# Altium PCB PCB1.PcbDoc (part 2 of 6)
Units mil, origin at the board's own origin, x right, y up, seen from the top; angles counter-clockwise.
Board outline 1280 x 1960 mil, 2 copper layers (Top Layer, Bottom Layer); 45 components, 63 nets, 326 pads, 83 vias.
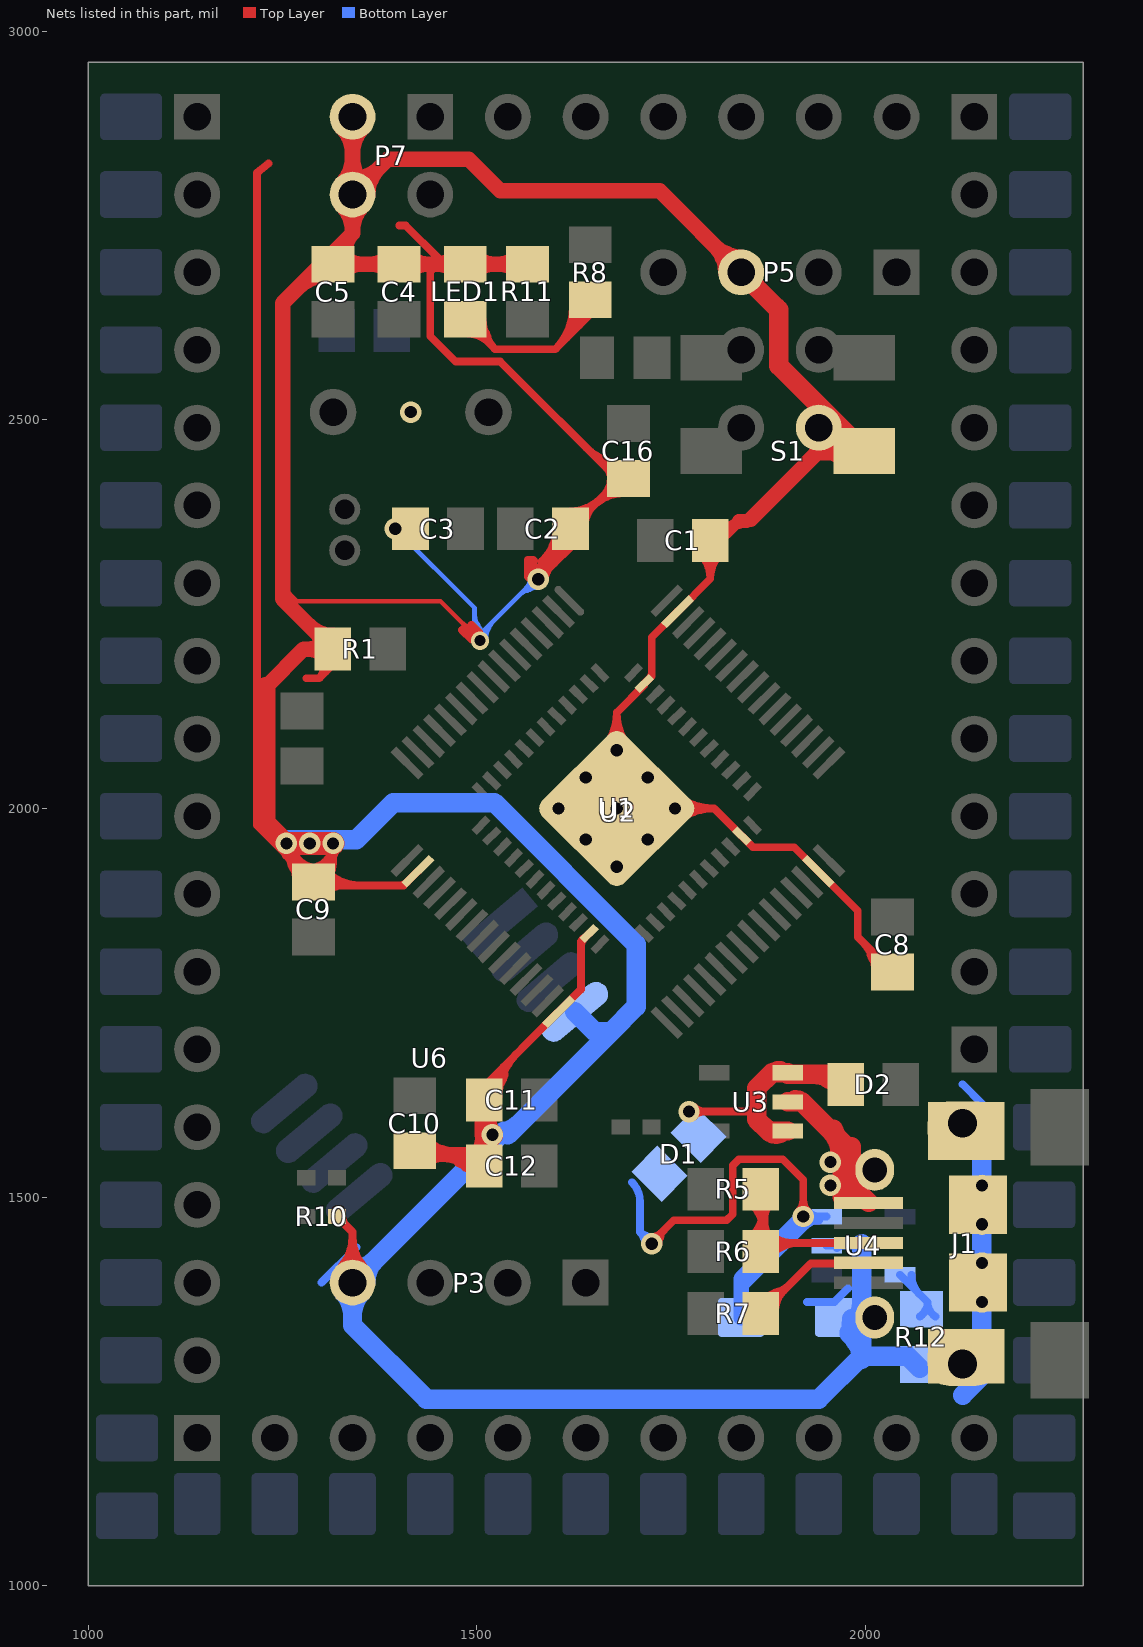
[diagram p2: the nets of this part, all layers, seen from the top]

## Via types
v1: diameter 27.56, hole 15.75, Top Layer to Bottom Layer, tented both sides, 79 vias
v2: diameter 23.62, hole 13.78, Top Layer to Bottom Layer, tented both sides, 3 vias
v3: diameter 23.62, hole 13.78, Top Layer to Bottom Layer, tented top, 1 vias

## Nets (pads, with @x,y where several pads share a name; then routed paths per layer and width w, separated by ;. In a path a pad name is that pad's centre, name@x,y a point inside that pad or via, vN(x,y) a via of type N, cw(c..) or ccw(c..) an arc to the next point about the centre after c; other vN are vias at no path point) (continued)
GND: C1.2 C2.1 C3.1 C4.1 C5.1 C8.2 C9.2 C10.1 C11.2 C12.2 C16.2 J1.4 LED1.2 P3.4 P5.3 P7.3 P7.4 pad.0@1940,2490 pad.1@1680,2000 pad.1@1965,1345 R1.2 R10.1 R11.2 R12.1 S1.1 U1.23 U1.35 U1.47 U2.18 U2.31 U2.47 U2.63 U3.2 U4.2 U6.4 | length 26636.5
  Top Layer w6: 1250,2285 1268.22,2266.78 1453.22,2266.78 v3@1497,2223 ; 1492.55,2223.12 ccw(c1504.93,2226.43) v3@1502.36,2213.88 ; 1496.88,2227.45 cw(c1493.57,2215.07) v3@1506.12,2217.64 ; 1481.96,2238.04 cw(c1466.92,2223) 1488.19,2223 ccw(c1466.92,2223) 1481.96,2238.04 ; 1481.96,2238.04 ccw(c1497,2253.08) 1497,2231.81 cw(c1497,2253.08) 1481.96,2238.04 ; 1487.96,2232.04 cw(c1472.92,2217) 1494.19,2217 ccw(c1472.92,2217) 1487.96,2232.04 ; 1487.96,2232.04 ccw(c1503,2247.08) 1503,2225.81 cw(c1503,2247.08) 1487.96,2232.04
  Top Layer w10: 1232,2830 1217,2818 1217,1978.43 ; 1239.74,1967.09 cw(c1234.08,1941.71) v1@1256.03,1955.65 ; v1@1252.13,1946.7 cw(c1249.35,1938.66) 1257.57,1940.86 cw(c1263.84,1942.54) v1@1260.08,1947.84 ; v1@1255.61,1956.06 cw(c1242.61,1933.53) 1267.73,1940.27 ; 1261.15,1928.9 ccw(c1295.15,1938.01) C9.2@1285.69,1904.11 ; 1261.39,1930.24 ccw(c1298.2,1940.1) C9.2@1285.61,1904.13 ; C9.2@1268.45,1911.49 ccw(c1235.24,1922.92) 1265.66,1940.48 ccw(c1295.61,1957.78) C9.2@1289.4,1923.75 ; 1280.94,2167.44 1297.21,2167.44 ; R1.2@1315.79,2186.02 1297.21,2167.44 ; R10.1@1320,1475 1340,1455 P3.4@1340,1390 ; 1400,2750 1408.47,2750 1450,2708.47 1450,2700.43 1440,2690.43 1440,2607.83 1472.83,2575 1530,2575 1680.43,2424.57 1680.43,2420 C2.1@1620.43,2360 C2.1@1620.43,2336.49 ; C10.1@1420,1559.57 1490.87,1559.57 C12.2@1510,1540.43 ; U2.18@1424.17,1919.25 1405.87,1900.96 1294.48,1900.96 C9.2@1290,1905.43 ; C10.1@1433.26,1543.45 cw(c1457.05,1502.28) 1469.33,1548.21 ; C10.1@1440.06,1568.89 ccw(c1476.74,1590.09) 1465.8,1549.16 ; 1466.69,1549.42 ccw(c1477.69,1566.95) C12.2@1494.47,1554.84 ; 1474.38,1554.64 ccw(c1483.71,1570.8) C12.2@1496.65,1557.35 ; 1475.72,1543.75 ccw(c1486.36,1560.69) C12.2@1502.57,1548.98 ; 1483.88,1549.15 cw(c1475.62,1534.84) C12.2@1491.58,1539.12 ; 1484.76,1538.08 ccw(c1495.02,1554.43) C12.2@1510.68,1543.13 ; 1485.89,1547.99 ccw(c1493.3,1560.83) C12.2@1503.59,1550.15 ; C11.2@1507.65,1637.34 ccw(c1502.52,1659.92) 1524.89,1653.93 ; C11.2@1509.57,1625 1509.57,1642.75 U2.31@1605.12,1738.3 1634,1767.18 1634,1828.72 U1.23@1644.51,1839.23 ; C11.2@1510.12,1627.68 ccw(c1491.54,1669.7) 1535.92,1657.81 ; C11.2@1524.04,1650.79 ccw(c1540,1646.51) C11.2@1525.69,1638.25 ; 1570.61,2306.01 cw(c1567.24,2293.43) v1@1580.15,2295.16 ; v1@1577.74,2295.24 cw(c1591.81,2292.36) 1588.09,2306.23 ; v1@1579.18,2293.8 ccw(c1576.3,2307.87) 1590.17,2304.15 ; 1595.97,2334.27 cw(c1627.13,2325.92) C2.1@1620.13,2357.41 ; 1599.61,2331.86 ccw(c1591.69,2361.44) C2.1@1621.79,2355.81 ; C2.1@1620.43,2345 C2.1@1620.43,2336.49 ; pad.1@1640.38,2038.84 ccw(c1635.07,2054.89) pad.1@1651.46,2050.75 ; pad.1@1648.35,2042.71 cw(c1657.63,2045.71) pad.1@1652.48,2053.99 ; pad.1@1648.55,2038.01 cw(c1686.77,2029.1) pad.1@1666.04,2062.43 ; pad.1@1661.24,2068.65 ccw(c1662.3,2077.71) pad.1@1671.32,2076.33 ; pad.1@1667.47,2062.33 ccw(c1661.15,2083.15) pad.1@1681.12,2074.52 ; pad.1@1678.88,2074.52 ccw(c1698.85,2083.15) pad.1@1692.53,2062.33 ; pad.1@1688.68,2076.33 ccw(c1697.7,2077.71) pad.1@1698.76,2068.65 ; pad.1@1693.96,2062.43 cw(c1673.23,2029.1) pad.1@1711.45,2038.01 ; pad.1@1707.52,2053.99 cw(c1702.37,2045.71) pad.1@1711.65,2042.71 ; pad.1@1708.54,2050.75 ccw(c1724.93,2054.89) pad.1@1719.62,2038.84 ; pad.1@1718.78,1959.98 cw(c1733.23,1960.2) pad.1@1726.51,1973 ; pad.1@1718.78,2040.02 ccw(c1733.23,2039.8) pad.1@1726.51,2027 ; pad.1@1718.86,1960.43 cw(c1735.46,1954.15) pad.1@1731.35,1971.42 ; pad.1@1718.86,2039.57 ccw(c1735.46,2045.85) pad.1@1731.35,2028.58 ; pad.1@1742.18,1987.37 cw(c1763.38,1980.77) pad.1@1754.51,2001.12 ; pad.1@1742.18,2012.63 ccw(c1763.38,2019.23) pad.1@1754.51,1998.88 ; 2006.15,1813.03 ccw(c2040.15,1822.14) C8.2@2030.69,1788.24 ; C8.2@2035,1789.57 1990,1834.57 1990,1868.43 U2.47@1939.18,1919.25 1908.43,1950 1855.28,1950 U1.35@1840.77,1964.51 1805.28,2000 v1(1755,2000) v1(1680,2000) v1(1680,2075) 1680,2123.34 ; 1217,1978.43 ccw(c1252.5,2013.93) 1254.63,1963.77 cw(c1252.5,2013.93) 1217,1978.43 ; 1217,1978.43 C9.2@1290,1905.43 ; v1@1253.93,1955.58 ccw(c1268.6,1947.66) 1254.16,1939.32 ; v1@1253.93,1955.58 ccw(c1268.6,1947.66) 1254.16,1939.32 ; v1@1253.93,1955.58 ccw(c1268.6,1947.66) 1254.16,1939.32 ; v1@1262.73,1950.83 ccw(c1287.1,1937.67) C9.2@1263.11,1923.82 ; v1@1262.73,1950.83 ccw(c1287.1,1937.67) C9.2@1263.11,1923.82 ; v1@1262.73,1950.83 ccw(c1287.1,1937.67) C9.2@1263.11,1923.82 ; C9.2@1290,1905.43 1290.43,1905.43 1315,1930 ; 1297.21,2167.44 ccw(c1284.48,2180.18) 1299.27,2190.44 cw(c1284.48,2180.18) 1297.21,2167.44 ; v1@1308.33,1949.29 cw(c1299.67,1941.87) 1310.69,1938.91 ; v1@1308.33,1949.29 cw(c1299.67,1941.87) 1310.69,1938.91 ; v1@1308.33,1949.29 cw(c1299.67,1941.87) 1310.69,1938.91 ; v1@1308.58,1949.01 cw(c1296.31,1937.57) 1312.51,1933.23 ; v1@1308.58,1949.01 cw(c1296.31,1937.57) 1312.51,1933.23 ; v1@1308.58,1949.01 cw(c1296.31,1937.57) 1312.51,1933.23 ; 1310.69,1938.91 cw(c1321.71,1935.96) v1@1317.92,1946.72 ; 1310.69,1938.91 cw(c1321.71,1935.96) v1@1317.92,1946.72 ; 1310.69,1938.91 cw(c1321.71,1935.96) v1@1317.92,1946.72 ; 1315,1930 cw(c1299.66,1945.33) 1296.58,1923.87 ccw(c1299.66,1945.33) 1315,1930 ; 1315,1930 ccw(c1326.73,1918.26) 1311.28,1912.22 cw(c1326.73,1918.26) 1315,1930 ; 1315,1930.02 cw(c1288.43,1930.02) 1294.24,1904.09 ccw(c1288.43,1930.02) 1315,1930.02 ; 1315,1930 v1(1315,1955) ; 1315,1933.8 cw(c1336.2,1933.8) 1321.21,1948.79 ccw(c1336.2,1933.8) 1315,1933.8 ; 1315,1933.8 ccw(c1293.8,1933.8) 1308.79,1948.79 cw(c1293.8,1933.8) 1315,1933.8 ; v1(1315,1955) cw(c1282.83,1955) 1289.86,1923.61 ccw(c1282.83,1955) v1(1315,1955) ; 1340,1425.07 cw(c1304.93,1425.07) 1329.73,1400.27 ccw(c1304.93,1425.07) 1340,1425.07 ; 1340,1425.07 ccw(c1375.07,1425.07) 1350.27,1400.27 cw(c1375.07,1425.07) 1340,1425.07 ; 1340,1449.21 cw(c1280.79,1449.21) 1322.66,1407.34 ccw(c1280.79,1449.21) 1340,1449.21 ; 1340,1449.21 ccw(c1399.21,1449.21) 1357.34,1407.34 cw(c1399.21,1449.21) 1340,1449.21 ; 1468.89,1559.57 cw(c1468.89,1604.53) 1437.1,1572.74 ccw(c1468.89,1604.53) 1468.89,1559.57 ; 1468.89,1559.57 ccw(c1468.89,1514.61) 1437.1,1546.4 cw(c1468.89,1514.61) 1468.89,1559.57 ; 1480.8,2229.54 ccw(c1496.45,2245.18) 1501.46,2223.63 cw(c1496.45,2245.18) 1480.8,2229.54 ; 1480.8,2229.54 1493.34,2217 1503,2217 1503,2226.66 1493.2,2236.47 ; 1493.2,2236.47 cw(c1482.09,2225.36) 1496.68,2219.53 ccw(c1482.09,2225.36) 1493.2,2236.47 ; 1565.57,2310 cw(c1553.93,2298.37) 1570.24,2296.17 ccw(c1553.93,2298.37) 1565.57,2310 ; 1565.57,2310 1565.57,2298.37 1573.94,2290 v1(1578.94,2295) ; 1565.57,2310 1565.57,2319.56 1572.63,2319.56 1573.94,2318.25 1566.87,2318.25 ; 1565.57,2310 1578.94,2296.63 v1(1578.94,2295) ; 1566.87,2318.25 cw(c1553.97,2305.35) 1570.83,2298.36 ccw(c1553.97,2305.35) 1566.87,2318.25 ; 1566.87,2318.25 1575,2310.12 ; 1575,2310.12 ccw(c1581.57,2310.12) 1580.44,2303.65 cw(c1581.57,2310.12) 1575,2310.12 ; 1575,2310.12 1575,2305 1580,2305 1583.94,2308.94 ; v1(1578.94,2295) 1598.94,2315 ; v1@1578.94,2303.78 ccw(c1578.94,2324.98) 1593.93,2309.99 ; v1@1578.94,2303.78 cw(c1578.94,2321.05) 1566.73,2308.84 ccw(c1578.94,2321.05) v1@1578.94,2303.78 ; v1@1578.94,2303.78 ccw(c1578.94,2324.98) 1593.93,2309.99 ; 1583.94,2308.94 cw(c1578.78,2308.94) 1578.84,2303.78 ccw(c1578.78,2308.94) 1583.94,2308.94 ; 1583.94,2308.94 1583.94,2318.25 ; 1583.94,2318.25 cw(c1566.21,2318.25) 1574.72,2302.7 ccw(c1566.21,2318.25) 1583.94,2318.25 ; 1583.94,2318.25 1587.81,2318.25 1591.06,2315 1598.94,2315 ; 1593.93,2309.99 ccw(c1608.91,2295) 1587.72,2295 cw(c1608.91,2295) 1593.93,2309.99 ; 1596.32,2331.06 cw(c1613.21,2314.17) 1617.27,2337.71 ccw(c1613.21,2314.17) 1596.32,2331.06 ; 1596.32,2331.06 ccw(c1580.54,2346.85) 1602.29,2351.87 cw(c1580.54,2346.85) 1596.32,2331.06 ; 1596.32,2331.06 1606.06,2331.06 ; 1596.32,2331.06 1586.59,2321.33 1592.61,2321.33 1598.94,2315 ; 1598.94,2315 ccw(c1579.32,2334.62) 1603.92,2347.45 cw(c1579.32,2334.62) 1598.94,2315 ; 1598.94,2315 C2.1@1620.43,2336.49 ; 1600,2325 ccw(c1585.99,2339.01) 1603.74,2347.8 cw(c1585.99,2339.01) 1600,2325 ; 1600,2325 1606.06,2331.06 ; 1606.06,2331.06 ccw(c1599.51,2337.62) 1606.46,2343.75 cw(c1599.51,2337.62) 1606.06,2331.06 ; 1606.79,2331.79 cw(c1620.43,2318.15) C2.1@1620.43,2337.44 ; 1606.79,2331.79 cw(c1620.43,2318.15) C2.1@1620.43,2337.44 ; 1606.79,2331.79 cw(c1620.43,2318.15) C2.1@1620.43,2337.44 ; 1606.79,2331.79 cw(c1620.43,2318.15) C2.1@1620.43,2337.44 ; C2.1@1620.43,2337.44 ccw(c1620.43,2294.63) 1590.16,2324.9 cw(c1620.43,2294.63) C2.1@1620.43,2337.44 ; pad.1@1639.87,2048.78 ccw(c1639.63,2065.22) pad.1@1651.42,2053.76 ; pad.1@1639.87,2048.78 ccw(c1639.63,2065.22) pad.1@1651.42,2053.76 ; pad.1@1639.87,2048.78 ccw(c1639.63,2065.22) pad.1@1651.42,2053.76 ; pad.1@1641.17,2048.7 ccw(c1642.43,2058.06) pad.1@1649.21,2051.48 ; pad.1@1641.17,2048.7 ccw(c1642.43,2058.06) pad.1@1649.21,2051.48 ; pad.1@1641.17,2048.7 ccw(c1642.43,2058.06) pad.1@1649.21,2051.48 ; pad.1@1644.28,2060.27 cw(c1665.56,2038.63) pad.1@1676.76,2066.84 ; pad.1@1644.28,2060.27 cw(c1665.56,2038.63) pad.1@1676.76,2066.84 ; pad.1@1644.28,2060.27 cw(c1665.56,2038.63) pad.1@1676.76,2066.84 ; pad.1@1647.93,2043.76 cw(c1654.13,2046.7) pad.1@1649.21,2051.48 ; pad.1@1647.93,2043.76 cw(c1654.13,2046.7) pad.1@1649.21,2051.48 ; pad.1@1647.93,2043.76 cw(c1654.13,2046.7) pad.1@1649.21,2051.48 ; pad.1@1648.78,2040.13 cw(c1674.73,2040.51) pad.1@1656.11,2058.59 ; pad.1@1648.78,2040.13 cw(c1674.73,2040.51) pad.1@1656.11,2058.59 ; pad.1@1648.78,2040.13 cw(c1674.73,2040.51) pad.1@1656.11,2058.59 ; pad.1@1650.27,2052.61 cw(c1681.71,2023.18) pad.1@1680.29,2066.23 ; pad.1@1650.27,2052.61 cw(c1681.71,2023.18) pad.1@1680.29,2066.23 ; pad.1@1650.27,2052.61 cw(c1681.71,2023.18) pad.1@1680.29,2066.23 ; pad.1@1655.22,2071.03 cw(c1671.75,2054.22) pad.1@1680.45,2076.13 ; pad.1@1655.22,2071.03 cw(c1671.75,2054.22) pad.1@1680.45,2076.13 ; pad.1@1655.22,2071.03 cw(c1671.75,2054.22) pad.1@1680.45,2076.13 ; pad.1@1666.17,2081.79 cw(c1677.94,2069.82) pad.1@1684.14,2085.43 ; pad.1@1666.17,2081.79 cw(c1677.94,2069.82) pad.1@1684.14,2085.43 ; pad.1@1666.17,2081.79 cw(c1677.94,2069.82) pad.1@1684.14,2085.43 ; pad.1@1666.77,2070.24 cw(c1680.58,2057.3) pad.1@1679.96,2076.22 ; pad.1@1666.77,2070.24 cw(c1680.58,2057.3) pad.1@1679.96,2076.22 ; pad.1@1666.77,2070.24 cw(c1680.58,2057.3) pad.1@1679.96,2076.22 ; C16.2@1672.44,2424.57 ccw(c1653.15,2424.57) 1666.79,2438.21 cw(c1653.15,2424.57) C16.2@1672.44,2424.57 ; C16.2@1672.44,2424.57 cw(c1642.12,2424.57) 1663.56,2403.13 ccw(c1642.12,2424.57) C16.2@1672.44,2424.57 ; pad.1@1675.86,2085.43 cw(c1682.06,2069.82) pad.1@1693.83,2081.79 ; pad.1@1675.86,2085.43 cw(c1682.06,2069.82) pad.1@1693.83,2081.79 ; pad.1@1675.86,2085.43 cw(c1682.06,2069.82) pad.1@1693.83,2081.79 ; pad.1@1679.55,2076.13 cw(c1688.25,2054.22) pad.1@1704.78,2071.03 ; pad.1@1679.55,2076.13 cw(c1688.25,2054.22) pad.1@1704.78,2071.03 ; pad.1@1679.55,2076.13 cw(c1688.25,2054.22) pad.1@1704.78,2071.03 ; pad.1@1679.71,2066.23 cw(c1678.29,2023.18) pad.1@1709.73,2052.61 ; pad.1@1679.71,2066.23 cw(c1678.29,2023.18) pad.1@1709.73,2052.61 ; pad.1@1679.71,2066.23 cw(c1678.29,2023.18) pad.1@1709.73,2052.61 ; pad.1@1680,2021.2 cw(c1658.8,2021.2) 1673.79,2006.21 ccw(c1658.8,2021.2) pad.1@1680,2021.2 ; pad.1@1680,2021.2 ccw(c1701.2,2021.2) pad.1@1686.21,2006.21 ; pad.1@1680,2021.2 ccw(c1701.2,2021.2) pad.1@1686.21,2006.21 ; pad.1@1680,2053.8 cw(c1701.2,2053.8) 1686.21,2068.79 ccw(c1701.2,2053.8) pad.1@1680,2053.8 ; pad.1@1680,2053.8 ccw(c1658.8,2053.8) 1673.79,2068.79 cw(c1658.8,2053.8) pad.1@1680,2053.8 ; pad.1@1680,2088.1 cw(c1627.39,2088.1) 1654.36,2042.93 ccw(c1627.39,2088.1) pad.1@1680,2088.1 ; pad.1@1680,2088.1 ccw(c1732.61,2088.1) 1705.64,2042.93 cw(c1732.61,2088.1) pad.1@1680,2088.1 ; pad.1@1680,2096.2 cw(c1658.8,2096.2) 1673.79,2081.21 ccw(c1658.8,2096.2) pad.1@1680,2096.2 ; pad.1@1680,2096.2 ccw(c1701.2,2096.2) 1686.21,2081.21 cw(c1701.2,2096.2) pad.1@1680,2096.2 ; 1680,2105.72 cw(c1616.86,2105.72) 1649.24,2051.51 ccw(c1616.86,2105.72) 1680,2105.72 ; 1680,2105.72 ccw(c1743.14,2105.72) 1710.76,2051.51 cw(c1743.14,2105.72) 1680,2105.72 ; 1680,2123.34 cw(c1606.34,2123.34) 1644.11,2060.1 ccw(c1606.34,2123.34) 1680,2123.34 ; 1680,2123.34 ccw(c1753.66,2123.34) 1715.89,2060.1 cw(c1753.66,2123.34) 1680,2123.34 ; 1680,2123.34 1715.49,2158.84 U1.47@1715.49,2160.77 1725.1,2170.38 1725.1,2220.19 U2.63@1758.23,2253.32 1758.32,2253.32 1800.43,2295.43 1800.43,2335 1804.96,2335 1837.24,2367.28 ; pad.1@1680.04,2076.22 cw(c1679.42,2057.3) pad.1@1693.23,2070.24 ; pad.1@1680.04,2076.22 cw(c1679.42,2057.3) pad.1@1693.23,2070.24 ; pad.1@1680.04,2076.22 cw(c1679.42,2057.3) pad.1@1693.23,2070.24 ; pad.1@1683.24,2066.84 cw(c1694.44,2038.63) pad.1@1715.72,2060.27 ; pad.1@1683.24,2066.84 cw(c1694.44,2038.63) pad.1@1715.72,2060.27 ; pad.1@1683.24,2066.84 cw(c1694.44,2038.63) pad.1@1715.72,2060.27 ; pad.1@1686.21,2006.21 ccw(c1701.2,2021.2) pad.1@1701.2,2000 ; pad.1@1686.21,2006.21 ccw(c1701.2,2021.2) pad.1@1701.2,2000 ; pad.1@1701.2,2000 ccw(c1701.2,1978.8) 1686.21,1993.79 cw(c1701.2,1978.8) pad.1@1701.2,2000 ; pad.1@1703.89,2058.59 cw(c1685.27,2040.51) pad.1@1711.22,2040.13 ; pad.1@1703.89,2058.59 cw(c1685.27,2040.51) pad.1@1711.22,2040.13 ; pad.1@1703.89,2058.59 cw(c1685.27,2040.51) pad.1@1711.22,2040.13 ; pad.1@1708.58,2053.76 ccw(c1720.37,2065.22) pad.1@1720.13,2048.78 ; pad.1@1708.58,2053.76 ccw(c1720.37,2065.22) pad.1@1720.13,2048.78 ; pad.1@1708.58,2053.76 ccw(c1720.37,2065.22) pad.1@1720.13,2048.78 ; pad.1@1710.79,2051.48 cw(c1705.87,2046.7) pad.1@1712.07,2043.76 ; pad.1@1710.79,2051.48 ccw(c1717.57,2058.06) pad.1@1718.83,2048.7 ; pad.1@1710.79,2051.48 cw(c1705.87,2046.7) pad.1@1712.07,2043.76 ; pad.1@1710.79,2051.48 ccw(c1717.57,2058.06) pad.1@1718.83,2048.7 ; pad.1@1710.79,2051.48 cw(c1705.87,2046.7) pad.1@1712.07,2043.76 ; pad.1@1710.79,2051.48 ccw(c1717.57,2058.06) pad.1@1718.83,2048.7 ; pad.1@1718.07,1968.56 ccw(c1709.6,2006.16) pad.1@1742.17,1985.57 ; pad.1@1718.07,1968.56 ccw(c1709.6,2006.16) pad.1@1742.17,1985.57 ; pad.1@1718.07,1968.56 ccw(c1709.6,2006.16) pad.1@1742.17,1985.57 ; pad.1@1718.07,1968.56 ccw(c1709.6,2006.16) pad.1@1742.17,1985.57 ; pad.1@1718.07,2031.44 cw(c1709.6,1993.84) pad.1@1742.17,2014.43 ; pad.1@1718.07,2031.44 cw(c1709.6,1993.84) pad.1@1742.17,2014.43 ; pad.1@1718.07,2031.44 cw(c1709.6,1993.84) pad.1@1742.17,2014.43 ; pad.1@1718.07,2031.44 cw(c1709.6,1993.84) pad.1@1742.17,2014.43 ; pad.1@1720.25,1968.78 ccw(c1720.98,1994.77) pad.1@1738.84,1975.87 ; pad.1@1720.25,1968.78 ccw(c1720.98,1994.77) pad.1@1738.84,1975.87 ; pad.1@1720.25,1968.78 ccw(c1720.98,1994.77) pad.1@1738.84,1975.87 ; pad.1@1720.25,2031.22 cw(c1720.98,2005.23) pad.1@1738.84,2024.13 ; pad.1@1720.25,2031.22 cw(c1720.98,2005.23) pad.1@1738.84,2024.13 ; pad.1@1720.25,2031.22 cw(c1720.98,2005.23) pad.1@1738.84,2024.13 ; pad.1@1723.3,1968.13 ccw(c1726.34,1975.6) pad.1@1733.15,1971.29 ; pad.1@1723.3,1968.13 ccw(c1726.34,1975.6) pad.1@1733.15,1971.29 ; pad.1@1723.3,1968.13 ccw(c1726.34,1975.6) pad.1@1733.15,1971.29 ; pad.1@1723.3,1968.13 ccw(c1726.34,1975.6) pad.1@1733.15,1971.29 ; pad.1@1723.3,2031.87 cw(c1726.34,2024.4) pad.1@1733.15,2028.71 ; pad.1@1723.3,2031.87 cw(c1726.34,2024.4) pad.1@1733.15,2028.71 ; pad.1@1723.3,2031.87 cw(c1726.34,2024.4) pad.1@1733.15,2028.71 ; pad.1@1723.3,2031.87 cw(c1726.34,2024.4) pad.1@1733.15,2028.71 ; pad.1@1724.29,1967.66 ccw(c1727.09,1972.67) pad.1@1731.04,1968.5 ; pad.1@1724.29,1967.66 ccw(c1727.09,1972.67) pad.1@1731.04,1968.5 ; pad.1@1724.29,1967.66 ccw(c1727.09,1972.67) pad.1@1731.04,1968.5 ; pad.1@1724.29,2032.34 cw(c1727.09,2027.33) pad.1@1731.04,2031.5 ; pad.1@1724.29,2032.34 cw(c1727.09,2027.33) pad.1@1731.04,2031.5 ; pad.1@1724.29,2032.34 cw(c1727.09,2027.33) pad.1@1731.04,2031.5 ; pad.1@1728.66,1961.43 cw(c1736.5,1962.73) pad.1@1731.04,1968.5 ; pad.1@1728.66,1961.43 cw(c1736.5,1962.73) pad.1@1731.04,1968.5 ; pad.1@1728.66,1961.43 cw(c1736.5,1962.73) pad.1@1731.04,1968.5 ; pad.1@1728.66,2038.57 ccw(c1736.5,2037.27) pad.1@1731.04,2031.5 ; pad.1@1728.66,2038.57 ccw(c1736.5,2037.27) pad.1@1731.04,2031.5 ; pad.1@1728.66,2038.57 ccw(c1736.5,2037.27) pad.1@1731.04,2031.5 ; pad.1@1728.78,1959.75 cw(c1745.15,1959.29) pad.1@1733.9,1971.2 ; pad.1@1728.78,1959.75 cw(c1745.15,1959.29) pad.1@1733.9,1971.2 ; pad.1@1728.78,1959.75 cw(c1745.15,1959.29) pad.1@1733.9,1971.2 ; pad.1@1728.78,2040.25 ccw(c1745.15,2040.71) pad.1@1733.9,2028.8 ; pad.1@1728.78,2040.25 ccw(c1745.15,2040.71) pad.1@1733.9,2028.8 ; pad.1@1728.78,2040.25 ccw(c1745.15,2040.71) pad.1@1733.9,2028.8 ; pad.1@1731.86,1969.26 ccw(c1701.51,2002.15) pad.1@1746.23,2000.35 ; pad.1@1731.86,1969.26 ccw(c1701.51,2002.15) pad.1@1746.23,2000.35 ; pad.1@1731.86,1969.26 ccw(c1701.51,2002.15) pad.1@1746.23,2000.35 ; pad.1@1731.86,2030.74 cw(c1701.51,1997.85) pad.1@1746.23,1999.65 ; pad.1@1731.86,2030.74 cw(c1701.51,1997.85) pad.1@1746.23,1999.65 ; pad.1@1731.86,2030.74 cw(c1701.51,1997.85) pad.1@1746.23,1999.65 ; pad.1@1733.8,2000 cw(c1733.8,1978.8) 1748.79,1993.79 ccw(c1733.8,1978.8) pad.1@1733.8,2000 ; pad.1@1733.8,2000 ccw(c1733.8,2021.2) 1748.79,2006.21 cw(c1733.8,2021.2) pad.1@1733.8,2000 ; pad.1@1736.31,1984.18 ccw(c1720.75,2004.75) pad.1@1746.3,2001.21 ; pad.1@1736.31,1984.18 ccw(c1720.75,2004.75) pad.1@1746.3,2001.21 ; pad.1@1736.31,1984.18 ccw(c1720.75,2004.75) pad.1@1746.3,2001.21 ; pad.1@1736.31,2015.82 cw(c1720.75,1995.25) pad.1@1746.3,1998.79 ; pad.1@1736.31,2015.82 cw(c1720.75,1995.25) pad.1@1746.3,1998.79 ; pad.1@1736.31,2015.82 cw(c1720.75,1995.25) pad.1@1746.3,1998.79 ; pad.1@1740.18,1964.34 ccw(c1719.45,1985.49) pad.1@1746.87,1996.68 ; pad.1@1740.18,1964.34 ccw(c1719.45,1985.49) pad.1@1746.87,1996.68 ; pad.1@1740.18,1964.34 ccw(c1719.45,1985.49) pad.1@1746.87,1996.68 ; pad.1@1740.18,2035.66 cw(c1719.45,2014.51) pad.1@1746.87,2003.32 ; pad.1@1740.18,2035.66 cw(c1719.45,2014.51) pad.1@1746.87,2003.32 ; pad.1@1740.18,2035.66 cw(c1719.45,2014.51) pad.1@1746.87,2003.32 ; pad.1@1741.5,1988.1 cw(c1751.51,1974.87) pad.1@1753.79,1991.3 ; pad.1@1741.5,1988.1 cw(c1751.51,1974.87) pad.1@1753.79,1991.3 ; pad.1@1741.5,1988.1 cw(c1751.51,1974.87) pad.1@1753.79,1991.3 ; pad.1@1741.5,2011.9 ccw(c1751.51,2025.13) pad.1@1753.79,2008.7 ; pad.1@1741.5,2011.9 ccw(c1751.51,2025.13) pad.1@1753.79,2008.7 ; pad.1@1741.5,2011.9 ccw(c1751.51,2025.13) pad.1@1753.79,2008.7 ; pad.1@1749.6,1985.63 ccw(c1735.62,2000.78) pad.1@1756.22,1999.95 ; pad.1@1749.6,1985.63 ccw(c1735.62,2000.78) pad.1@1756.22,1999.95 ; pad.1@1749.6,1985.63 ccw(c1735.62,2000.78) pad.1@1756.22,1999.95 ; pad.1@1749.6,2014.37 cw(c1735.62,1999.22) pad.1@1756.22,2000.05 ; pad.1@1749.6,2014.37 cw(c1735.62,1999.22) pad.1@1756.22,2000.05 ; pad.1@1749.6,2014.37 cw(c1735.62,1999.22) pad.1@1756.22,2000.05 ; pad.1@1750.81,1974.75 ccw(c1734.34,1991.57) pad.1@1756.13,2000.46 ; pad.1@1750.81,1974.75 ccw(c1734.34,1991.57) pad.1@1756.13,2000.46 ; pad.1@1750.81,1974.75 ccw(c1734.34,1991.57) pad.1@1756.13,2000.46 ; pad.1@1750.81,2025.25 cw(c1734.34,2008.43) pad.1@1756.13,1999.54 ; pad.1@1750.81,2025.25 cw(c1734.34,2008.43) pad.1@1756.13,1999.54 ; pad.1@1750.81,2025.25 cw(c1734.34,2008.43) pad.1@1756.13,1999.54 ; pad.1@1761.44,1985.17 ccw(c1749.22,1997.64) pad.1@1765.39,2004.24 ; pad.1@1761.44,1985.17 ccw(c1749.22,1997.64) pad.1@1765.39,2004.24 ; pad.1@1761.44,1985.17 ccw(c1749.22,1997.64) pad.1@1765.39,2004.24 ; pad.1@1761.44,2014.83 cw(c1749.22,2002.36) pad.1@1765.39,1995.76 ; pad.1@1761.44,2014.83 cw(c1749.22,2002.36) pad.1@1765.39,1995.76 ; pad.1@1761.44,2014.83 cw(c1749.22,2002.36) pad.1@1765.39,1995.76 ; pad.1@1763.5,1997.79 cw(c1771.11,1995.81) pad.1@1772.95,2003.46 ; pad.1@1763.5,1997.79 cw(c1771.11,1995.81) pad.1@1772.95,2003.46 ; pad.1@1763.5,1997.79 cw(c1771.11,1995.81) pad.1@1772.95,2003.46 ; pad.1@1763.5,2002.21 ccw(c1771.11,2004.19) pad.1@1772.95,1996.54 ; pad.1@1763.5,2002.21 ccw(c1771.11,2004.19) pad.1@1772.95,1996.54 ; pad.1@1763.5,2002.21 ccw(c1771.11,2004.19) pad.1@1772.95,1996.54 ; pad.1@1769.48,2000 cw(c1769.48,2055.07) 1722.58,2026.21 ccw(c1769.48,2055.07) pad.1@1769.48,2000 ; pad.1@1769.48,2000 ccw(c1769.48,1944.93) 1722.58,1973.79 cw(c1769.48,1944.93) pad.1@1769.48,2000 ; pad.1@1776.2,2000 cw(c1776.2,2021.2) 1761.21,2006.21 ccw(c1776.2,2021.2) pad.1@1776.2,2000 ; pad.1@1776.2,2000 ccw(c1776.2,1978.8) 1761.21,1993.79 cw(c1776.2,1978.8) pad.1@1776.2,2000 ; 1787.38,2000 cw(c1787.38,2066.08) 1731.1,2031.45 ccw(c1787.38,2066.08) 1787.38,2000 ; 1787.38,2000 ccw(c1787.38,1933.92) 1731.1,1968.55 cw(c1787.38,1933.92) 1787.38,2000 ; 1800.43,2296.11 cw(c1845.39,2296.11) 1813.6,2327.9 ccw(c1845.39,2296.11) 1800.43,2296.11 ; 1800.43,2296.11 ccw(c1755.48,2296.11) 1787.27,2327.9 cw(c1755.48,2296.11) 1800.43,2296.11 ; 1805.27,2000 cw(c1805.27,2077.09) 1739.62,2036.69 ccw(c1805.27,2077.09) 1805.27,2000 ; 1805.27,2000 ccw(c1805.27,1922.91) 1739.62,1963.31 cw(c1805.27,1922.91) 1805.27,2000 ; 1837.23,2367.28 cw(c1822.23,2382.28) 1810.62,2364.52 ccw(c1822.23,2382.28) 1837.23,2367.28 ; 1233.1,1962.33 ccw(c1253.81,1983.05) 1255.05,1953.78 cw(c1253.81,1983.05) 1233.1,1962.33 ; v1@1251.49,1943.94 cw(c1212.98,1905.43) 1267.44,1905.43 ccw(c1212.98,1905.43) v1@1251.49,1943.94 ; v1@1253.78,1955 ccw(c1286,1955) 1263.22,1932.22 cw(c1286,1955) v1@1253.78,1955 ; 1260.99,1934.44 ccw(c1286.06,1959.51) 1286.06,1924.06 cw(c1286.06,1959.51) 1260.99,1934.44 ; v1@1263.78,1955 ccw(c1320.14,1955) 1280.29,1915.15 cw(c1320.14,1955) v1@1263.78,1955 ; C9.2@1268.56,1926.87 cw(c1247.12,1905.43) 1277.44,1905.43 ccw(c1247.12,1905.43) C9.2@1268.56,1926.87 ; C9.2@1292.05,1913.85 ccw(c1285.63,1942.51) 1315,1942.51 cw(c1285.63,1942.51) C9.2@1292.05,1913.85 ; C9.2@1300.03,1911.53 ccw(c1325.56,1937.06) 1325.56,1900.96 cw(c1325.56,1937.06) C9.2@1300.03,1911.53 ; 1305.67,2175.9 ccw(c1294.46,2187.11) 1307.48,2196.15 cw(c1294.46,2187.11) 1305.67,2175.9 ; C9.2@1307.1,1892.27 cw(c1328.09,1871.29) 1328.09,1900.96 ccw(c1328.09,1871.29) C9.2@1307.1,1892.27 ; C9.2@1307.1,1918.6 ccw(c1349.7,1961.2) 1349.7,1900.96 cw(c1349.7,1961.2) C9.2@1307.1,1918.6 ; R10.1@1326.81,1475 ccw(c1343.25,1475) 1331.63,1463.37 cw(c1343.25,1475) R10.1@1326.81,1475 ; 1400,1900.96 ccw(c1400,1915.13) 1410.02,1905.11 cw(c1400,1915.13) 1400,1900.96 ; C10.1@1426.87,1559.57 cw(c1426.87,1461.24) 1496.4,1530.77 ccw(c1426.87,1461.24) C10.1@1426.87,1559.57 ; 1451.01,1559.57 cw(c1451.01,1485.39) 1503.47,1537.84 ccw(c1451.01,1485.39) 1451.01,1559.57 ; 1475.16,1559.57 cw(c1475.16,1509.53) 1510.54,1544.91 ccw(c1475.16,1509.53) 1475.16,1559.57 ; C11.2@1518.19,1628.94 cw(c1572.34,1628.94) 1534.05,1667.23 ccw(c1572.34,1628.94) C11.2@1518.19,1628.94 ; C11.2@1528.19,1628.94 cw(c1606.49,1628.94) 1551.12,1684.3 ccw(c1606.49,1628.94) C11.2@1528.19,1628.94 ; 1588.01,2322.75 ccw(c1554.7,2356.06) 1601.81,2356.06 cw(c1554.7,2356.06) 1588.01,2322.75 ; 1608.58,2324.64 ccw(c1591.99,2341.23) 1612.79,2352.08 cw(c1591.99,2341.23) 1608.58,2324.64 ; C2.1@1620.43,2372.56 ccw(c1620.43,2402.88) 1641.87,2381.44 cw(c1620.43,2402.88) C2.1@1620.43,2372.56 ; C2.1@1620.43,2382.56 ccw(c1620.43,2437.02) 1658.94,2398.51 cw(c1620.43,2437.02) C2.1@1620.43,2382.56 ; 1634,1821.93 cw(c1650.67,1821.93) 1638.88,1833.72 ccw(c1650.67,1821.93) 1634,1821.93 ; 1634,1826.68 cw(c1641.53,1826.68) 1638.91,1833.74 ccw(c1641.53,1826.68) 1634,1826.68 ; C2.1@1639.05,2363.94 cw(c1674.51,2363.94) 1649.44,2389.01 ccw(c1674.51,2363.94) C2.1@1639.05,2363.94 ; 1641.13,2463.87 ccw(c1691.06,2513.81) 1691.06,2443.19 cw(c1691.06,2513.81) 1641.13,2463.87 ; 1648.92,2388.49 cw(c1691.06,2346.35) 1691.06,2405.94 ccw(c1691.06,2346.35) 1648.92,2388.49 ; 1658.2,2446.8 ccw(c1691.06,2479.67) 1691.06,2433.19 cw(c1691.06,2479.67) 1658.2,2446.8 ; 1665.99,2405.56 cw(c1691.06,2380.49) 1691.06,2415.94 ccw(c1691.06,2380.49) 1665.99,2405.56 ; U1.47@1721.12,2166.28 ccw(c1711.49,2175.91) 1725.1,2175.91 cw(c1711.49,2175.91) U1.47@1721.12,2166.28 ; C1.2@1805.15,2356.15 ccw(c1815.35,2371.75) 1828.53,2358.57 cw(c1815.35,2371.75) C1.2@1805.15,2356.15 ; 1996.49,1828.08 cw(c1957.98,1789.57) 2012.44,1789.57 ccw(c1957.98,1789.57) 1996.49,1828.08 ; 2005.99,1818.57 ccw(c2031.06,1843.64) 2031.06,1808.19 cw(c2031.06,1843.64) 2005.99,1818.57 ; C8.2@2013.56,1811.01 cw(c1992.12,1789.57) 2022.44,1789.57 ccw(c1992.12,1789.57) C8.2@2013.56,1811.01
  Top Layer w15: C1.2@1800.43,2345 1811.42,2345 1833.7,2367.28 ; 1837.24,2367.28 1833.7,2367.28 ; 1833.7,2367.28 cw(c1818.02,2382.96) 1807.84,2363.26 ccw(c1818.02,2382.96) 1833.7,2367.28 ; 1935.4,2460 cw(c1935.4,2406.82) 1973.01,2444.42 ccw(c1935.4,2406.82) 1935.4,2460 ; 1935.4,2460 ccw(c1935.4,2513.18) 1973.01,2475.58 cw(c1935.4,2513.18) 1935.4,2460
  Top Layer w18: 1837.24,2370 1847.28,2370
  Top Layer w20: 1228.5,2156.5 1277,2205 R1.2@1314.57,2205 1250,2269.57 1250,2285 1250,2650 1340,2740 ; C5.1@1315,2700.43 C4.1@1400,2700.43 1450,2700.43 ; P7.4@1339.54,2790.09 cw(c1372.6,2783.32) 1363.86,2815.92 ; P7.3@1340,2890 P7.4@1340,2790 ; P7.4@1340.09,2789.54 ccw(c1333.32,2822.6) 1365.92,2813.86 ; R11.2@1550,2700.43 LED1.2@1485,2700.43 1450,2700.43 ; 1814.08,2713.86 ccw(c1846.68,2722.6) P5.3@1839.91,2689.54 ; 1816.14,2715.92 cw(c1807.4,2683.32) P5.3@1840.46,2690.09 ; 1852.58,2372.28 1923.5,2443.2 ; P5.3@1860,2670 P5.3@1840,2690 1735,2795 1530,2795 1489.47,2835.53 1385.53,2835.53 P7.4@1340,2790 ; 1923.5,2443.5 1940,2460 ; 1281.68,2205 cw(c1281.68,2172.11) 1304.93,2195.37 ccw(c1281.68,2172.11) 1281.68,2205 ; 1281.68,2205 ccw(c1281.68,2237.89) 1304.93,2214.63 cw(c1281.68,2237.89) 1281.68,2205 ; 1340,2740 ccw(c1364.14,2715.86) 1331.83,2704.83 cw(c1364.14,2715.86) 1340,2740 ; 1340,2740 P7.4@1340,2790 ; 1340,2742.86 cw(c1387.14,2742.86) 1353.81,2776.19 ccw(c1387.14,2742.86) 1340,2742.86 ; 1340,2742.86 ccw(c1292.86,2742.86) 1326.19,2776.19 cw(c1292.86,2742.86) 1340,2742.86 ; 1340,2837.14 cw(c1292.86,2837.14) 1326.19,2803.81 ccw(c1292.86,2837.14) 1340,2837.14 ; 1340,2837.14 ccw(c1387.14,2837.14) 1353.81,2803.81 cw(c1387.14,2837.14) 1340,2837.14 ; 1340,2842.86 cw(c1387.14,2842.86) 1353.81,2876.19 ccw(c1387.14,2842.86) 1340,2842.86 ; 1340,2842.86 ccw(c1292.86,2842.86) 1326.19,2876.19 cw(c1292.86,2842.86) 1340,2842.86 ; 1351.82,2700.43 cw(c1351.82,2733.32) 1328.57,2710.07 ccw(c1351.82,2733.32) 1351.82,2700.43 ; 1351.82,2700.43 ccw(c1351.82,2667.55) 1328.57,2690.8 cw(c1351.82,2667.55) 1351.82,2700.43 ; 1363.18,2700.43 cw(c1363.18,2667.55) 1386.43,2690.8 ccw(c1363.18,2667.55) 1363.18,2700.43 ; 1363.18,2700.43 ccw(c1363.18,2733.32) 1386.43,2710.07 cw(c1363.18,2733.32) 1363.18,2700.43 ; 1373.34,2823.34 cw(c1340,2856.67) 1340,2809.53 ccw(c1340,2856.67) 1373.34,2823.34 ; 1373.34,2823.34 ccw(c1406.67,2790) 1359.53,2790 cw(c1406.67,2790) 1373.34,2823.34 ; 1436.82,2700.43 cw(c1436.82,2733.32) 1413.57,2710.07 ccw(c1436.82,2733.32) 1436.82,2700.43 ; 1436.82,2700.43 ccw(c1436.82,2667.55) 1413.57,2690.8 cw(c1436.82,2667.55) 1436.82,2700.43 ; 1448.18,2700.43 cw(c1448.18,2667.55) 1471.43,2690.8 ccw(c1448.18,2667.55) 1448.18,2700.43 ; 1448.18,2700.43 ccw(c1448.18,2733.32) 1471.43,2710.07 cw(c1448.18,2733.32) 1448.18,2700.43 ; 1450,2700.43 cw(c1450,2671.83) LED1.2@1471.04,2691.21 ; 1450,2700.43 ccw(c1450,2729.04) LED1.2@1471.04,2709.66 ; 1450,2700.43 cw(c1450,2671.83) LED1.2@1471.04,2691.21 ; 1450,2700.43 ccw(c1450,2729.04) LED1.2@1471.04,2709.66 ; 1450,2700.43 cw(c1450,2671.83) LED1.2@1471.04,2691.21 ; 1450,2700.43 ccw(c1450,2729.04) LED1.2@1471.04,2709.66 ; 1450,2700.43 cw(c1450,2671.83) LED1.2@1471.04,2691.21 ; 1450,2700.43 ccw(c1450,2729.04) LED1.2@1471.04,2709.66 ; 1521.82,2700.43 cw(c1521.82,2733.32) 1498.57,2710.07 ccw(c1521.82,2733.32) 1521.82,2700.43 ; 1521.82,2700.43 ccw(c1521.82,2667.55) 1498.57,2690.8 cw(c1521.82,2667.55) 1521.82,2700.43 ; 1528.18,2700.43 cw(c1528.18,2667.55) 1551.43,2690.8 ccw(c1528.18,2667.55) 1528.18,2700.43 ; 1528.18,2700.43 ccw(c1528.18,2733.32) 1551.43,2710.07 cw(c1528.18,2733.32) 1528.18,2700.43 ; 1806.66,2723.34 cw(c1773.33,2690) 1820.47,2690 ccw(c1773.33,2690) 1806.66,2723.34 ; 1806.66,2723.34 ccw(c1840,2756.67) 1840,2709.53 cw(c1840,2756.67) 1806.66,2723.34 ; 1269.66,2669.66 cw(c1311.06,2628.26) 1311.06,2686.81 ccw(c1311.06,2628.26) 1269.66,2669.66 ; 1284.59,2234.98 ccw(c1314.57,2264.95) 1314.57,2222.56 cw(c1314.57,2264.95) 1284.59,2234.98 ; R1.2@1294.1,2225.47 cw(c1277.56,2208.94) 1300.94,2208.94 ccw(c1277.56,2208.94) R1.2@1294.1,2225.47
  Top Layer w25: 1228.5,2156.5 1228.5,1981.5 v1(1255,1955) ; v1@1509.57,1580 C11.2@1509.57,1625 ; C12.2@1510,1540.43 v1@1510,1580 ; 1513.27,1594.46 cw(c1533.27,1599.82) C11.2@1517.85,1613.64 ; C12.2@1514.15,1562.79 cw(c1537.21,1562.79) v1@1520.9,1579.1 ; v1@1514.15,1568.26 ccw(c1532.33,1563.39) C12.2@1518.02,1551.16 ; P5.3@1839.64,2690.31 1885,2644.95 ; P5.3@1860,2670 1888.5,2641.5 1888.5,2569.93 S1.1@1998.43,2460 1940,2460 ; U3.2@1900,1622.4 1918.29,1622.4 1970,1570.69 ; 1958.79,1587.51 ccw(c2000.17,1598.6) 1978.75,1561.5 ; 1959.99,1583.01 ccw(c2002.8,1594.48) 1980.64,1556.11 ; J1.4@1970,1500 1970,1570.69 ; J1.4@2004.13,1492.96 1982,1515.09 1982,1565 1975,1565 1975.35,1565.35 1970,1570.69 ; C12.2@1501.7,1551.8 ccw(c1482.72,1570.79) 1509.57,1570.79 ; C12.2@1501.7,1551.8 ccw(c1482.72,1570.79) 1509.57,1570.79 ; C12.2@1501.7,1551.8 ccw(c1481.67,1571.84) 1510,1571.84 cw(c1481.67,1571.84) C12.2@1501.7,1551.8 ; C12.2@1501.7,1551.8 ccw(c1482.72,1570.79) 1509.57,1570.79 ; C12.2@1501.7,1551.8 ccw(c1482.72,1570.79) 1509.57,1570.79 ; C12.2@1506.96,1561.07 cw(c1535.32,1553.47) v1@1520.64,1578.89 ; C12.2@1506.96,1561.07 cw(c1535.32,1553.47) v1@1520.64,1578.89 ; C12.2@1506.96,1561.07 cw(c1535.32,1553.47) v1@1520.64,1578.89 ; C12.2@1506.96,1561.07 cw(c1535.32,1553.47) v1@1520.64,1578.89 ; C12.2@1506.96,1561.07 cw(c1535.32,1553.47) v1@1520.64,1578.89 ; C12.2@1506.96,1561.07 cw(c1535.32,1553.47) v1@1520.64,1578.89 ; C12.2@1506.96,1561.07 cw(c1535.32,1553.47) v1@1520.64,1578.89 ; C12.2@1506.96,1561.07 cw(c1535.32,1553.47) v1@1520.64,1578.89 ; C12.2@1506.96,1561.07 cw(c1535.32,1553.47) v1@1520.64,1578.89 ; C12.2@1506.96,1561.07 cw(c1535.32,1553.47) v1@1520.64,1578.89 ; C12.2@1506.96,1561.07 cw(c1535.32,1553.47) v1@1520.64,1578.89 ; C12.2@1506.96,1561.07 cw(c1535.32,1553.47) v1@1520.64,1578.89 ; C12.2@1507.2,1561.37 cw(c1535.07,1553.9) v1@1520.64,1578.89 ; C12.2@1507.2,1561.37 cw(c1535.07,1553.9) v1@1520.64,1578.89 ; C12.2@1507.2,1561.37 cw(c1535.07,1553.9) v1@1520.64,1578.89 ; 1509.57,1570.79 ccw(c1536.42,1570.79) C12.2@1517.43,1551.8 ; 1509.57,1570.79 ccw(c1536.42,1570.79) C12.2@1517.43,1551.8 ; 1509.57,1570.79 ccw(c1536.42,1570.79) C12.2@1517.43,1551.8 ; 1509.57,1570.79 ccw(c1536.42,1570.79) C12.2@1517.43,1551.8 ; 1509.57,1594.21 cw(c1536.42,1594.21) 1517.43,1613.2 ccw(c1536.42,1594.21) 1509.57,1594.21 ; 1509.57,1594.21 ccw(c1482.72,1594.21) 1501.7,1613.2 cw(c1482.72,1594.21) 1509.57,1594.21 ; C12.2@1517.43,1551.8 cw(c1535.37,1569.74) 1510,1569.74 ccw(c1535.37,1569.74) C12.2@1517.43,1551.8 ; v1@1520.9,1579.1 ccw(c1547.23,1552.77) 1510,1552.77 cw(c1547.23,1552.77) v1@1520.9,1579.1 ; C11.2@1509.57,1608.28 ccw(c1548.28,1608.28) 1520.9,1580.9 cw(c1548.28,1608.28) C11.2@1509.57,1608.28 ; U3.2@1909.84,1625.06 cw(c1909.84,1611.08) 1919.72,1620.97 ccw(c1909.84,1611.08) U3.2@1909.84,1625.06 ; 1954.64,1586.05 cw(c1923.58,1555) 1967.5,1555 ccw(c1923.58,1555) 1954.64,1586.05
  Top Layer w30: v1(1255,1955) v1(1285,1955) v1(1315,1955)
  Bottom Layer w6: v1@1393.8,2359.76 ccw(c1411.29,2363.34) 1406.67,2346.09 ; v1(1395,2360) 1497,2258 v3@1497,2223 ; v1@1395.24,2361.2 cw(c1391.66,2343.71) 1408.91,2348.33 ; v3@1497.57,2223.94 ccw(c1494.73,2227.56) 1498.71,2229.86 ccw(c1506.24,2234.2) v3@1504.63,2225.66 ; v3@1497.92,2224.2 ccw(c1492,2232.57) 1500.88,2237.69 ; v3@1501.38,2219.3 ccw(c1495.81,2227.18) 1504.17,2232 ; v3@1501.9,2219.59 ccw(c1491.47,2244.13) 1517.23,2237.23 ; v3@1503,2223 v1@1575,2295 ; 1565.2,2280.54 ccw(c1559.63,2301.36) v1@1580.1,2294.62 ; J1.4@2140,1270 J1.4@2140,1595 ; 2140.89,1330.07 ccw(c2135.81,1336.11) 2142.64,1340.05 ; 2140.89,1541.93 cw(c2135.81,1535.89) 2142.64,1531.95 ; J1.4@2140.9,1558.43 ccw(c2135.88,1564.42) J1.4@2142.64,1568.33 ; J1.4@2141.26,1313.28 cw(c2137.5,1308.38) J1.4@2142.73,1305.08 ; J1.4@2141.56,1558.95 ccw(c2134.37,1569.03) J1.4@2145.02,1575.35 ; 2141.58,1330.61 ccw(c2134.4,1340.69) 2145.04,1347 ; 2141.58,1541.39 cw(c2134.4,1531.31) J1.4@2145.04,1525 ; J1.4@2141.64,1313 cw(c2135.06,1303.59) J1.4@2144.77,1297.46 ; J1.4@2143.8,1306.78 cw(c2152.48,1301.31) J1.4@2150.21,1311.31 ; J1.4@2144.36,1565.36 ccw(c2153.24,1570.51) J1.4@2150.6,1560.59 ; 2144.39,1337.02 ccw(c2153.27,1342.15) 2150.62,1332.24 ; 2144.39,1534.98 cw(c2153.27,1529.85) 2150.62,1539.76 ; 2145.06,1325.72 ccw(c2138.2,1335.35) 2148.37,1341.39 ; 2145.06,1546.28 cw(c2138.2,1536.65) 2148.37,1530.61 ; 2145.05,1554.06 ccw(c2138.17,1563.7) J1.4@2148.35,1569.74 ; J1.4@2145.09,1317.91 cw(c2138.67,1308.75) J1.4@2148.13,1302.79 ; J1.4@2148.53,1320.83 ccw(c2141.99,1330.02) 2151.7,1335.78 ; J1.4@2148.53,1322.83 cw(c2142.29,1313.92) J1.4@2151.49,1308.11 ; 2148.54,1549.18 ccw(c2141.98,1558.37) J1.4@2151.68,1564.13 ; 2148.53,1551.17 cw(c2141.99,1541.98) 2151.7,1536.22 ; 1413.4,2341.6 cw(c1431.8,2360) 1405.78,2360 ccw(c1431.8,2360) 1413.4,2341.6 ; 1413.4,2341.6 ccw(c1395,2323.2) 1395,2349.22 cw(c1395,2323.2) 1413.4,2341.6 ; J1.4@2134.61,1289.34 ccw(c2127.34,1301.93) J1.4@2141.38,1298.16 ; J1.4@2134.61,1289.34 ccw(c2127.34,1301.93) J1.4@2141.38,1298.16 ; J1.4@2134.61,1289.34 ccw(c2127.34,1301.93) J1.4@2141.38,1298.16 ; J1.4@2134.61,1585.66 cw(c2121.6,1563.13) J1.4@2146.73,1569.86 ; J1.4@2134.61,1585.66 cw(c2121.6,1563.13) J1.4@2146.73,1569.86 ; J1.4@2134.61,1585.66 cw(c2121.6,1563.13) J1.4@2146.73,1569.86 ; J1.4@2135.28,1289.69 ccw(c2126.04,1308.64) J1.4@2146.41,1303.19 ; J1.4@2135.28,1289.69 ccw(c2126.04,1308.64) J1.4@2146.41,1303.19 ; J1.4@2135.28,1289.69 ccw(c2126.04,1308.64) J1.4@2146.41,1303.19 ; J1.4@2140,1306.02 cw(c2113.98,1306.02) 2132.38,1287.62 ccw(c2113.98,1306.02) J1.4@2140,1306.02 ; J1.4@2140,1306.02 ccw(c2166.02,1306.02) 2147.62,1287.62 cw(c2166.02,1306.02) J1.4@2140,1306.02 ; J1.4@2140,1568.98 cw(c2166.02,1568.98) 2147.62,1587.38 ccw(c2166.02,1568.98) J1.4@2140,1568.98 ; J1.4@2140,1568.98 ccw(c2113.98,1568.98) 2132.38,1587.38 cw(c2113.98,1568.98) J1.4@2140,1568.98 ; J1.4@2140,1595 ccw(c2192.52,1595) 2155.44,1557.81 cw(c2192.52,1595) J1.4@2140,1595 ; J1.4@2140.41,1294.54 ccw(c2151.61,1291.54) J1.4@2143.39,1283.37 ; J1.4@2140.41,1294.54 ccw(c2151.61,1291.54) J1.4@2143.39,1283.37 ; J1.4@2140.41,1294.54 ccw(c2151.61,1291.54) J1.4@2143.39,1283.37 ; J1.4@2143.11,1304.61 ccw(c2160.16,1300.04) J1.4@2147.64,1287.6 ; J1.4@2143.11,1304.61 ccw(c2160.16,1300.04) J1.4@2147.64,1287.6 ; J1.4@2143.11,1304.61 ccw(c2160.16,1300.04) J1.4@2147.64,1287.6 ; J1.4@2146.41,1303.19 ccw(c2167.5,1297.54) J1.4@2149.09,1285.8 ; J1.4@2146.41,1303.19 ccw(c2167.5,1297.54) J1.4@2149.09,1285.8 ; J1.4@2146.41,1303.19 ccw(c2167.5,1297.54) J1.4@2149.09,1285.8 ; 2146.71,1530.31 ccw(c2172.07,1523.51) J1.4@2149.34,1510.39 ; 2146.71,1530.31 ccw(c2172.07,1523.51) J1.4@2149.34,1510.39 ; 2146.71,1530.31 ccw(c2172.07,1523.51) J1.4@2149.34,1510.39 ; J1.4@2146.74,1569.86 cw(c2171.87,1576.6) J1.4@2149.34,1589.61 ; J1.4@2146.74,1569.86 cw(c2171.87,1576.6) J1.4@2149.34,1589.61 ; J1.4@2146.74,1569.86 cw(c2171.87,1576.6) J1.4@2149.34,1589.61 ; 1497,2238.27 ccw(c1524.27,2238.27) 1504.99,2218.99 cw(c1524.27,2238.27) 1497,2238.27 ; 1497,2252.76 ccw(c1538.76,2252.76) 1509.23,2223.23 cw(c1538.76,2252.76) 1497,2252.76 ; v3@1505.81,2217 cw(c1527.08,2217) 1512.04,2232.04 ccw(c1527.08,2217) v3@1505.81,2217 ; v3@1511.81,2217 cw(c1547.57,2217) 1522.28,2242.28 ccw(c1547.57,2217) v3@1511.81,2217 ; 1553.81,2273.81 cw(c1578.94,2248.69) 1578.94,2284.22 ccw(c1578.94,2248.69) 1553.81,2273.81 ; 1563.32,2283.32 ccw(c1551.64,2295) 1568.16,2295 cw(c1551.64,2295) 1563.32,2283.32 ; 1564.06,2284.06 cw(c1578.94,2269.17) 1578.94,2290.22 ccw(c1578.94,2269.17) 1564.06,2284.06 ; J1.4@2140,1279.28 cw(c2187.18,1279.28) 2155.15,1313.91 ccw(c2187.18,1279.28) J1.4@2140,1279.28 ; J1.4@2140,1293 cw(c2174.49,1293) 2151.07,1318.32 ccw(c2174.49,1293) J1.4@2140,1293 ; J1.4@2140,1306.72 cw(c2161.8,1306.72) 2147,1322.72 ccw(c2161.8,1306.72) J1.4@2140,1306.72 ; 2140,1337.78 ccw(c2163.78,1337.78) 2146.96,1320.96 cw(c2163.78,1337.78) 2140,1337.78 ; 2140,1352.26 ccw(c2178.26,1352.26) 2151.21,1325.21 cw(c2178.26,1352.26) 2140,1352.26 ; J1.4@2140,1366.75 ccw(c2192.75,1366.75) 2155.45,1329.45 cw(c2192.75,1366.75) J1.4@2140,1366.75 ; 2140,1383.98 cw(c2166.02,1383.98) 2147.62,1402.38 ccw(c2166.02,1383.98) 2140,1383.98 ; 2140,1436.02 ccw(c2166.02,1436.02) 2147.62,1417.62 cw(c2166.02,1436.02) 2140,1436.02 ; 2140,1478.98 cw(c2166.02,1478.98) 2147.62,1497.38 ccw(c2166.02,1478.98) 2140,1478.98 ; 2140,1505.25 cw(c2192.75,1505.25) 2155.45,1542.55 ccw(c2192.75,1505.25) 2140,1505.25 ; J1.4@2140,1519.74 cw(c2178.26,1519.74) 2151.21,1546.79 ccw(c2178.26,1519.74) J1.4@2140,1519.74 ; 2140,1531.02 ccw(c2166.02,1531.02) 2147.62,1512.62 cw(c2166.02,1531.02) 2140,1531.02 ; 2140,1534.22 cw(c2163.78,1534.22) 2146.96,1551.04 ccw(c2163.78,1534.22) 2140,1534.22 ; J1.4@2140,1566.09 ccw(c2163.69,1566.09) 2146.97,1549.31 cw(c2163.69,1566.09) J1.4@2140,1566.09 ; J1.4@2140,1580.54 ccw(c2178.11,1580.54) 2151.2,1553.56 cw(c2178.11,1580.54) J1.4@2140,1580.54
  Bottom Layer w10: 1300.13,1390 1345.49,1435.35 ; 1924.71,1365 1960.08,1365 1977.46,1382.38 ; U4.2@1950,1437.4 1992.4,1437.4 1995,1440 ; 2125,1645 J1.4@2150,1620 ; 1971.53,1437.4 cw(c1971.53,1449.09) 1963.27,1440.83 ccw(c1971.53,1449.09) 1971.53,1437.4 ; 1971.53,1437.4 ccw(c1971.53,1425.71) 1963.27,1433.98 cw(c1971.53,1425.71) 1971.53,1437.4
  Bottom Layer w20: P7.4@1340,2790 P7.4@1350,2790
  Bottom Layer w25: v1@1255,1960 1345,1960 1392.5,2007.5 1522.5,2007.5 1705,1825 1705,1745 1672.5,1712.5 ; 1540,1580 1672.5,1712.5 ; U6.4@1626.1,1738.25 1651.85,1712.5 1672.5,1712.5 ; pad.1@1982.36,1343.11 ccw(c2028.55,1336.04) 1991.12,1308.06 ; 1995,1440 1995,1295 ; R12.1@2070,1279.57 2054.57,1295 1995,1295 ; 2125,1245 J1.4@2150,1270 ; J1.4@2125,1610 2140,1595 2150,1585 J1.4@2150,1515 J1.4@2150,1465 J1.4@2150,1415 J1.4@2150,1365 2150,1280 J1.4@2140,1270 ; J1.4@2145,1269.76 J1.4@2147.62,1272.38 ; 1340,1348.89 cw(c1381.11,1348.89) 1352.04,1377.96 ccw(c1381.11,1348.89) 1340,1348.89 ; 1340,1348.89 ccw(c1298.89,1348.89) 1327.96,1377.96 cw(c1298.89,1348.89) 1340,1348.89 ; 1369.07,1419.07 cw(c1340,1448.14) 1340,1407.03 ccw(c1340,1448.14) 1369.07,1419.07 ; 1369.07,1419.07 ccw(c1398.14,1390) 1357.03,1390 cw(c1398.14,1390) 1369.07,1419.07 ; 1535,1585 cw(c1524.48,1595.51) 1520.36,1581.23 ccw(c1524.48,1595.51) 1535,1585 ; 1535,1585 P3.4@1340,1390 1340,1335 1435,1240 1940,1240 1995,1295 ; v1@1255.9,1954.1 cw(c1270.16,1939.84) 1270.16,1960 ccw(c1270.16,1939.84) v1@1255.9,1954.1 ; 1269.84,1960 cw(c1269.84,1939.84) 1284.1,1954.1 ccw(c1269.84,1939.84) 1269.84,1960 ; v1@1285.9,1954.1 cw(c1300.16,1939.84) 1300.16,1960 ccw(c1300.16,1939.84) v1@1285.9,1954.1 ; 1299.84,1960 cw(c1299.84,1939.84) 1314.1,1954.1 ccw(c1299.84,1939.84) 1299.84,1960 ; v1@1315.9,1954.1 cw(c1330.16,1939.84) 1330.16,1960 ccw(c1330.16,1939.84) v1@1315.9,1954.1 ; 1510.74,1560.74 ccw(c1491.49,1580) 1518.72,1580 cw(c1491.49,1580) 1510.74,1560.74 ; v1@1520,1581.28 ccw(c1520,1632.65) 1556.33,1596.33 cw(c1520,1632.65) v1@1520,1581.28 ; pad.1@1979.1,1325.9 ccw(c1940.7,1364.3) 1995,1364.3 cw(c1940.7,1364.3) pad.1@1979.1,1325.9 ; pad.1@1979.21,1323.99 cw(c1953.59,1291.46) 1995,1291.46 ccw(c1953.59,1291.46) pad.1@1979.21,1323.99
  other v1: 1955,1515 1955,1545 1520,1580 1680,1925 1640,1960 1720,1960 1605,2000 1640,2040 1720,2040 1415,2510
  other v3: 1504,2216
NetD1_1: D1.1 pad.1@1840,1345 U4.3 | length 1289.6
  Top Layer w10: v1@1725.32,1438.82 ccw(c1721.1,1454.17) 1736.47,1450.05 ; v1@1731.62,1448.38 1753.23,1470 1821.3,1470 1829.19,1477.88 1829.19,1540.49 1837.25,1548.56 1893.61,1548.56 1920,1522.17 v1(1920,1475) ; 1920,1496.2 cw(c1898.8,1496.2) 1913.79,1481.21 ccw(c1898.8,1496.2) 1920,1496.2 ; 1920,1496.2 ccw(c1941.2,1496.2) 1926.21,1481.21 cw(c1941.2,1496.2) 1920,1496.2 ; v1@1725,1448.78 ccw(c1725,1465.71) 1736.97,1453.74 cw(c1725,1465.71) v1@1725,1448.78 ; v1@1733.78,1440 cw(c1759.24,1440) 1741.24,1458 ccw(c1759.24,1440) v1@1733.78,1440
  Bottom Layer w10: v1(1725,1440) 1709.95,1455.05 1709.95,1493.92 ; 1840,1380 U4.3@1934.8,1474.8 ; 1907.27,1460.27 cw(c1932.39,1453.53) v1@1919.39,1476.06 ; v1@1914.67,1468.02 cw(c1910.25,1462.23) 1917.29,1460.34 cw(c1926.52,1457.87) v1@1923.12,1466.79 ; U4.3@1950,1474.8 U4.3@1934.8,1474.8 ; 1709.95,1493.92 ccw(c1674.49,1493.92) 1699.56,1518.99 cw(c1674.49,1493.92) 1709.95,1493.92 ; 1710.01,1454.99 cw(c1695.02,1440) 1716.22,1440 ccw(c1695.02,1440) 1710.01,1454.99 ; 1710.01,1454.99 ccw(c1725,1469.98) 1725,1448.78 cw(c1725,1469.98) 1710.01,1454.99 ; U4.3@1934.8,1474.8 cw(c1934.8,1482.72) 1927.79,1479.06 ccw(c1934.8,1482.72) U4.3@1934.8,1474.8 ; U4.3@1934.8,1474.8 ccw(c1934.8,1466.53) 1927.62,1470.64 cw(c1934.8,1466.53) U4.3@1934.8,1474.8 ; 1894.41,1434.41 ccw(c1853.81,1475) 1911.22,1475 cw(c1853.81,1475) 1894.41,1434.41 ; 1911.48,1451.48 ccw(c1887.95,1475) 1921.22,1475 cw(c1887.95,1475) 1911.48,1451.48 ; v1@1922.75,1462.75 cw(c1940.16,1445.34) 1940.16,1469.96 ccw(c1940.16,1445.34) v1@1922.75,1462.75 ; v1@1926.21,1468.79 cw(c1940.72,1454.28) 1940.72,1474.8 ccw(c1940.72,1454.28) v1@1926.21,1468.79 ; v1@1926.21,1481.21 ccw(c1941.67,1496.67) 1941.67,1474.8 cw(c1941.67,1496.67) v1@1926.21,1481.21
  Bottom Layer w20: pad.1@1840,1345 1840,1395 v1(1920,1475)
NetD1_2: D1.2 D2.2 U3.1 U3.3 | length 600.8
  Top Layer w10: v1(1773,1610) 1855,1610 1860,1615 ; 1794.2,1610 cw(c1794.2,1631.2) 1779.21,1616.21 ccw(c1794.2,1631.2) 1794.2,1610 ; 1794.2,1610 ccw(c1794.2,1588.8) 1779.21,1603.79 cw(c1794.2,1588.8) 1794.2,1610
  Top Layer w25: U3.1@1900,1585 1875,1585 ; U3.3@1900,1658 D2.2@1964.76,1658 ; U3.3@1900,1659.8 1879.8,1659.8 1860,1640 1860,1615 1860,1600 1875,1585 ; D2.2@1951.17,1652.93 ccw(c1959.16,1666.77) D2.2@1971.19,1656.25 ; D2.2@1964.76,1659.8 D2.2@1979.57,1645 ; 1875,1585 ccw(c1884.77,1594.77) 1891.44,1582.67 cw(c1884.77,1594.77) 1875,1585 ; 1868.82,1591.18 ccw(c1890.16,1612.52) 1890.16,1582.34 cw(c1890.16,1612.52) 1868.82,1591.18 ; 1877.02,1657.02 cw(c1890.16,1643.88) 1890.16,1662.46 ccw(c1890.16,1643.88) 1877.02,1657.02 ; 1930.84,1658 cw(c1930.84,1600.21) 1971.7,1641.07 ccw(c1930.84,1600.21) 1930.84,1658
NetJ1_2: J1.2 R7.2 | length 391.1
  Top Layer w10: R7.2@1864.11,1354.31 cw(c1898.01,1344.85) 1888.9,1378.85 ; R7.2@1865.43,1350 1930,1414.57 2003.28,1414.57 J1.2@2004.13,1415.41 ; R7.2@1865.43,1362.56 ccw(c1865.43,1392.88) 1886.87,1371.44 cw(c1865.43,1392.88) R7.2@1865.43,1362.56 ; R7.2@1865.43,1372.56 ccw(c1865.43,1427.02) 1903.94,1388.51 cw(c1865.43,1427.02) R7.2@1865.43,1372.56 ; R7.2@1884.06,1353.94 cw(c1919.51,1353.94) 1894.44,1379.01 ccw(c1919.51,1353.94) R7.2@1884.06,1353.94
NetJ1_3: J1.3 R5.1 R6.2 | length 853.3
  Top Layer w10: R6.2@1858.39,1451.18 ccw(c1853.66,1462.75) 1865.74,1465.99 ; R6.2@1865,1430 R6.2@1870,1435 ; R5.1@1865,1510 1870,1505 R6.2@1870,1435 ; 1867.46,1459.56 ccw(c1882.56,1463.61) R6.2@1874.74,1450.06 ; R6.2@1878.19,1452.1 ccw(c1905,1478.91) 1905,1441 ; R6.2@1878.23,1425.77 cw(c1915,1389) 1915,1441 ; J1.3@2004.13,1441 1876,1441 R6.2@1870,1435 ; R5.1@1858.39,1488.82 cw(c1853.67,1477.25) 1865.74,1474.02 ; R5.1@1858.39,1488.82 cw(c1853.67,1477.25) 1865.74,1474.02 ; R5.1@1858.39,1488.82 cw(c1853.67,1477.25) 1865.74,1474.02 ; 1867.46,1480.45 cw(c1882.56,1476.4) R5.1@1874.74,1489.94 ; 1867.46,1480.45 cw(c1882.56,1476.4) R5.1@1874.74,1489.94 ; 1867.46,1480.45 cw(c1882.56,1476.4) R5.1@1874.74,1489.94 ; R6.2@1852.27,1447.1 ccw(c1809.45,1489.92) 1870,1489.92 cw(c1809.45,1489.92) R6.2@1852.27,1447.1 ; R5.1@1852.26,1492.9 cw(c1809.45,1450.08) 1870,1450.08 ccw(c1809.45,1450.08) R5.1@1852.26,1492.9 ; R6.2@1859.34,1440.03 ccw(c1833.6,1465.78) 1870,1465.78 cw(c1833.6,1465.78) R6.2@1859.34,1440.03 ; R5.1@1859.34,1499.97 cw(c1833.59,1474.22) 1870,1474.22 ccw(c1833.59,1474.22) R5.1@1859.34,1499.97 ; 1870,1467.87 ccw(c1899.37,1467.87) 1878.6,1447.1 cw(c1899.37,1467.87) 1870,1467.87 ; 1870,1472.13 cw(c1899.36,1472.13) 1878.6,1492.9 ccw(c1899.36,1472.13) 1870,1472.13 ; R6.2@1871.53,1427.84 cw(c1891.23,1408.14) 1891.23,1436 ccw(c1891.23,1408.14) R6.2@1871.53,1427.84
NetLED1_1: LED1.1 R8.2 | length 803.9
  Top Layer w10: LED1.1@1485,2629.57 1523.57,2591 1601,2591 ; LED1.1@1489.31,2630.9 cw(c1479.85,2597) 1513.85,2606.1 ; R8.2@1626.72,2643.83 cw(c1613.22,2634.3) R8.2@1629.5,2631.49 ; 1627.68,2620.9 cw(c1664.37,2614.57) R8.2@1646.15,2647.05 ; R8.2@1650,2654.57 R8.2@1645.87,2654.57 1645.87,2635.87 1601,2591 ; 1601,2591 ccw(c1546.19,2645.82) 1623.39,2652.87 cw(c1546.19,2645.82) 1601,2591 ; LED1.1@1488.94,2610.95 cw(c1488.94,2575.49) 1514.01,2600.56 ccw(c1488.94,2575.49) LED1.1@1488.94,2610.95 ; LED1.1@1497.56,2629.57 ccw(c1527.88,2629.57) 1506.44,2608.13 cw(c1527.88,2629.57) LED1.1@1497.56,2629.57 ; LED1.1@1507.56,2629.57 ccw(c1562.02,2629.57) 1523.51,2591.06 cw(c1562.02,2629.57) LED1.1@1507.56,2629.57 ; 1616.09,2606.09 ccw(c1573.84,2648.34) 1633.34,2653.78 cw(c1573.84,2648.34) 1616.09,2606.09 ; 1631.18,2621.18 ccw(c1601.49,2650.87) 1643.3,2654.69 cw(c1601.49,2650.87) 1631.18,2621.18
NetR12_2: R12.2 U4.5 | length 165.4
  Bottom Layer w10: U4.5@2044.49,1400 R12.2@2080,1364.49 ; U4.5@2059.17,1400 ccw(c2094.63,1400) R12.2@2069.56,1374.93 ; R12.2@2080,1364.49 cw(c2058.18,1364.49) 2069.95,1346.11 ccw(c2058.18,1364.49) R12.2@2080,1364.49 ; R12.2@2080,1364.49 ccw(c2101.82,1364.49) 2090.05,1346.11 cw(c2101.82,1364.49) R12.2@2080,1364.49